# Altium PCB PCB_C20003-A.PcbDoc (part 2 of 2)
Units mil, origin at the board's own origin, x right, y up, seen from the top; angles counter-clockwise.
Board outline 2450.31 x 1640 mil, 2 copper layers (Top, Bottom), stack 12.7 mil thick; 109 components, 60 nets, 279 pads, 480 vias.
Unrouted connection lines stored in the file: 1.
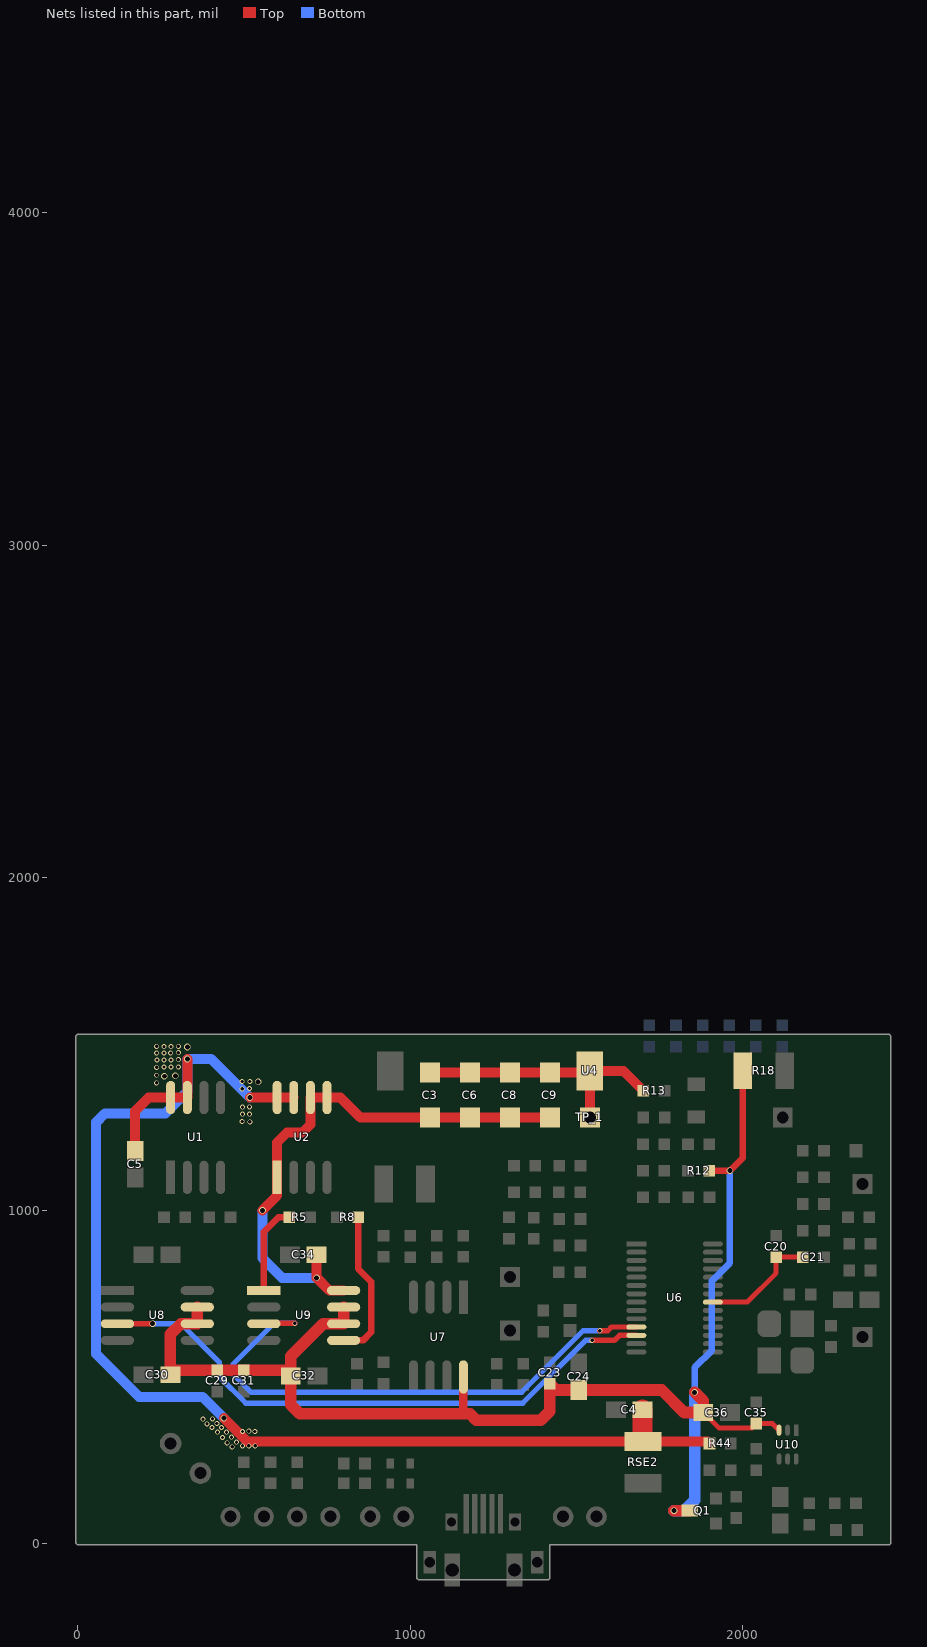
[diagram p2: the nets of this part, all layers, seen from the top]

## Via types
v1: diameter 15, hole 10, Top to Bottom, tented both sides, 451 vias
v2: diameter 20, hole 15, Top to Bottom, tented both sides, 29 vias

## Nets (pads, with @x,y where several pads share a name; then routed paths per layer and width w, separated by ;. In a path a pad name is that pad's centre, name@x,y a point inside that pad or via, vN(x,y) a via of type N, cw(c..) or ccw(c..) an arc to the next point about the centre after c; other vN are vias at no path point) (continued)
PLLCOML: C20.1 C21.1 U6.21 | length 354
  Top w15: U6.21@1910,725 1910.5,725.5 2013.5,725.5 2098.58,810.58 2098.58,811.56 2100,812.98 C20.1@2100,860 C21.1@2180,860
PWM00: U6.12 U8.3 | length 1769.3
  Top w16: U8.3@120,660 v2(226,660) ; v1(1547,610) 1614,610 1629,625 U6.12@1680,625
  Bottom w16: v2(226,660) 311,660 427,544 427,500 506,421 1338,421 1527,610 v1(1547,610)
PWM01: U6.11 U9.3 | length 1674.1
  Top w16: U9.3@561,661 v1(653,661) ; v1(1570,639) 1594,639 1605,650 U6.11@1680,650
  Bottom w16: v1(653,661) 590,661 468,539 468,508 522,454 1335,454 1520,639 v1(1570,639)
RHB: C3.1 C6.1 C8.1 C9.1 C34.1 U2.1 U2.5 U2.6 U9.8 | length 1673.3
  Top w30: v2(556,1001) 600,1045 U2.1@600,1100 600,1205 630,1235 676,1235 700,1259 U2.6@700,1340 U2.5@750,1340 790,1340 850,1280 C3.1@1060,1280 C6.1@1180,1280 C8.1@1300,1280 C9.1@1420,1280 ; C34.1@719,867 v2(719,798) 757,760 U9.8@800,760
  Top w40: C34.1@719,867 C34.1@723,863
  Bottom w30: v2(556,1001) 556,857 615,798 v2(719,798)
RLG: R8.2 U9.5 | length 454.5
  Top w20: U9.5@800,610 858,610 883,635 883,786 844,825 R8.2@844,980
RUG: R5.2 U9.1 | length 270.2
  Top w20: U9.1@560,760 560,936 604,980 R5.2@636,980
VBUS: C4.1 C5.1 R44.1 RSE2.2 U1.7 U1.8 U2.7 U2.8 | length 3944
  Top w30: C5.1@173,1179 173,1299 214,1340 U1.8@280,1340 U1.7@330,1340 v2(330,1456) ; v2(440,376) 488,328 509.5,306.5 510,306 515,306 534,306 1303.97,306 ; v2(518,1340) U2.8@600,1340 U2.7@650,1340 ; 1303.98,305.98 RSE2.2@1700,305.98 ; RSE2.2@1705.98,300 RSE2.2@1700,305.98 ; R44.1@1900,300 1894.02,305.98 RSE2.2@1700,305.98
  Top w60: RSE2.2@1699,306.98 C4.1@1699,402
  Bottom w30: v2(440,376) 375.62,440.38 184.62,440.38 56,569 56,1266 82,1292 264,1292 330,1358 v2(330,1456) 402,1456 482.5,1375.5 493.5,1364.5 504,1354 v2(518,1340)
  other v1: 465,290 496,293 515,293 534,293 450,302 478,304 436,318 463,319 421,334 448,334 496,336 533,336 515,337 404,348 433,348 389,359 419,360 377,373 406,374 518,1267 495,1268 496,1290 517,1290 496,1311 517,1312 495,1366 517,1367 238,1384 495,1388 518,1388 238,1407 238,1431 260,1432 281,1432 303,1432 239,1453 260,1453 281,1453 303,1454 238,1474 260,1474 280,1474 303,1475 260,1493 281,1493 238,1494 303,1494
  other v2: 543,1387 261,1404 294,1405 330,1492
VCC: C23.1 C24.1 C29.1 C30.1 C31.1 C32.1 C35.1 C36.1 Q1.2 R12.2 R18.1 U7.8 U8.6 U8.7 U9.6 U9.7 U10.3 | length 4401.8
  Top w15: C36.1@1881.92,393 1927.92,347 2027,347 C35.1@2040,360 2088.82,360 U10.3@2108.82,340
  Top w20: R12.2@1899,1120 v2(1961,1120) 2000,1159 R18.1@2000,1420
  Top w25: 1160,389 U7.8@1160,500
  Top w35: U8.7@360,710 U8.6@360,660 311,660 279,628 C30.1@279,507 292,520 C29.1@420,520 C31.1@500,520 624,520 C32.1@641,503 ; U9.7@800,710 U9.6@800,660 739,660 641,562 C32.1@641,503 ; v2(1793,98) Q1.2@1840,98 ; v2(1855,454) 1881,428 C36.1@1881,393 1824,393 1756,461 C24.1@1507,461 1439,461 C23.1@1420,480 1420,397 1393,370 1199,370 1180,389 1160,389 668,389 641,416 C32.1@641,503
  Bottom w20: v2(1855,454) 1855,528 1907,580 1907,789 1961,843 v2(1961,1120)
  Bottom w35: v2(1793,98) 1824,98 1855,129 v2(1855,454)
VDEMO: C3.2 C6.2 C8.2 C9.2 R13.2 TP_1.1 U4.1 | length 807.9
  Top w30: C3.2@1060,1415 C6.2@1180,1415 C8.2@1300,1415 C9.2@1420,1415 1535,1415 U4.1@1540,1420 ; TP_1.1@1540,1280 U4.1@1540,1420 ; R13.2@1701,1360 1641,1420 U4.1@1540,1420
pads on no net: U5.2 U5.3 U5.4

## Polygon pours and split planes (outlines as drawn)
GND on Top "GND" (solid): 1725,514 1711,514 1513,316 1496,299 1496,62 1674,62 1722,14 2151,14 2151,414 2143,422 2051,514 1725,514
VBUS on Top "LHB" (solid, remove dead copper, pour order 1008): 526,280 445,280 359,366 359,394 493,394 526,361 526,280
VBUS on Top "LHB" (solid, remove dead copper, pour order 1007): 1166,361 1191,336 1191,248 1078,248 1046,280 1043,283 1043,361 1166,361
VBUS on Top "LHB" (solid, remove dead copper, pour order 1006): 345,1437 345,1509 306,1509 17,1509 17,1462 17,1249 99,1249 207,1249 208,1250 208,1295 345,1295 345,1437
VBUS on Top "LHB" (solid, remove dead copper, pour order 1005): 669,1400 482,1400 482,1317 482,1249 481,1248 533,1248 533,1289 631,1289 669,1289 669,1400
IDEMO on Top "LHB" (solid, remove dead copper, pour order 1004): 721,1216 679,1174 678,1173 678,1049 721,1049 721,1092 721,1162 778,1162 778,1049 842,1049 949,1049 949,1089 949,1214 947,1216 721,1216
IDEMO on Top "LHB" (solid, remove dead copper, pour order 1003): 533,1217 533,1048 455,1048 455,1072 455,1164 405,1164 405,1050.44 404.56,1050 355.44,1050 355.44,1178.44 394,1217 533,1217
VDEMO on Top "LHB" (solid, remove dead copper, pour order 1002): 1004,1509 1004,1359 1077,1359 1344,1359 1605,1359 1605,1475 1605,1509 1004,1509
RHB on Top "LHB" (solid, remove dead copper, pour order 1001): 614,1050 623,1050 623,1079 623,1125 623,1186 670,1186 709,1225 721,1237 1334,1237 1464,1237 1464,1339 850,1339 850,1400 679,1400 679,1361 679,1275 577,1275 546,1275 546,1224 546,1050 614,1050
LHB on Top "GND" (solid, remove dead copper, pour order 1000): 361,1274 223,1274 223,1051 223,1050 297,1050 297,1144 400,1247 400,1248 400,1274 361,1274
GND on Top "GND" (solid, remove dead copper, pour order 1001): 198,1129 17,1129 17,1094 17,14 82,14 1062,14 1065,11 1049,27 1049,1130 199,1130 198,1129
GND on Top "GND" (solid, remove dead copper, pour order 1002): 251,655 251,669 233,687 225,695 225,723 225,815 226,816 249,816 249,770 253,766 287,732 287,702 287,690 265,668 265,654 252,654 251,655
GND on Top "GND" (solid, remove dead copper, pour order 1003): 158,904 319,904 330,893 331,892 331,794 410,794 410,946 236,946 222,960 206,960 201,960 154,913 145,904 158,904
GND on Top "GND" (solid, pour order 1004): 817,787 771.01,787 771.01,883.38 747.52,906.74 589,906.74 589,934 817,934 817,787
GND on Top "GND" (solid, pour order 1005): 666,813 687,813 687,789 687,785 739,733 739,705 739,697 738,696 719,696 697,674 680,674 679,674 659,694 667,702 667,716 667,812 666,813
GND on Top "GND" (solid, pour order 1006): 975,421 1132,421 1133,421.89 1133,438 976,438 975,437.11 975,421
GND on Top "GND" (solid, pour order 1007): 1177,-83 1178,-82 1400,-82 1400,38 1399,39 1333,39 1333,90 1298,90 1298,13 1294,9 1177,9 1177,-83
GND on Top "GND" (solid, pour order 1008): 1548,1195 1548,1156 1548,974 1565,957 1572,950 1618,950 1856,950 1857,949 1857,971 1755,971 1730,996 1718,1008 1718,1022 1718,1195 1548,1195
GND on Top "GND" (solid, pour order 1009): 1329,1214 1329,1091 1328,1090 1276,1090 1276,1069 1267,1060 1261,1060 1261,1058 1248,1045 1248,1029 1248,1028 1254,1022 1255,1023 1272,1023 1318,1023 1336,1005 1336,963 1336,949 1255,949 1255,902 1274,883 1275,882 1332,882 1340,874 1342,872 1342,855 1260,855 1248,843 1248,758 1255,751 1257,753 1342,753 1372,753 1375,750 1350,725 1350,710 1350,693 1345,688 1256,688 1254,688 1245,679 1253,671 1253,602 1253,599 1260,592 1352,592 1352,593 1355,596 1356,597 1356,662 1421,662 1433,650 1433,609 1433,572 1431,570 1315,570 1259,570 1235,594 1185,644 1185,662 1185,819 1193,827 1193,898 1193,1214 1329,1214
GND on Top "GND" (solid, pour order 1010): 1201,531 1202,530 1202,479 1203,479 1232,450 1302,450 1302,472 1335,505 1344.05,514.05 1382.05,514.05 1384.95,514.05 1390,509 1388,507 1388,415 1388,414 1375,401 1374,400 1218,400 1216,400 1193,423 1185,431 1185,547 1201,531
GND on Top "GND" (solid, pour order 1011): 1008.12,654.94 1008.19,655 1135,655 1135,672 1017.11,672 1007,672 1008.12,671 1008.12,654.94
GND on Top "GND" (solid, pour order 1012): 1456,418 1456,384 1422,350 1422,349 1653,349 1655,351 1655,427 1545,427 1538,420 1537,421 1480,421 1478,421 1468,431 1465,434 1456,434
GND on Top "GND" (solid, pour order 1013): 1541,590 1602,590 1591,579 1591,569 1591,562 1602,551 1624,529 1643,529 1650,529 1665,544 1675,554 1721,554 1721,730 1708,743 1699,743 1699,756 1711,756 1720,747 1732,735 1732,701 1732,627 1758,601 1760,599 1784,599 1784,492 1674,492 1547,492 1546,493 1541,498 1541,590
GND on Top "GND" (solid, pour order 1014): 1636,750 1636,806 1585,806 1572,793 1542,793 1542,785 1524,767 1523,766 1523,757 1535,745 1539,741 1636,741
GND on Top "GND" (solid, pour order 1015): 1773,880 1773,862 1773,861 1757,845 1746,834 1746,814 1772,788 1795,765 1795,724 1795,610 1774,589 1774,496 1795,475 1810,460 1811,460 1841,490 1866,490 1931,425 1931,411 1931,397 1990,397 2008,397 2009,398 2009,475 1992,475 1976,491 1976,535 1976,536 1958,554 1901,554 1874,554 1858,570 1833,595 1833,630 1833,641 1823,651 1823,667 1842,686 1852,686 1857,691 1862,696 1862,880 1773,880
GND on Top "GND" (solid, pour order 1016): 1745,414 1745,352 1808,352 1746,414 1745,414
GND on Top "GND" (solid, pour order 1017): 1375,519.22 1375,574 1431,574 1433,572.17 1434,571.26 1497,571.26 1497,516.48 1491,511 1388,511 1384,511 1375,519.22
GND on Top "GND" (solid, pour order 1018): 1601,1330 1601,1207 1602,1206 1603,1205 1715,1205 1715,1323 1659,1323 1659,1353 1641,1371 1621,1371 1621,1331 1622,1330 1601,1330
GND on Top "GND" (solid, pour order 1019): 2127,322 2195,322 2195,395 2195,396 2236,437 2274,475 2358,475 2414,531 2425,542 2425,555 2425,571 2300,571 2273,544 2231,544 2231,497 2148,497 2019,497 2019,485 2009,475 1992,458 1992,397 2052,397 2053,396 2065,384 2086,384 2104,384 2126,362 2127,361 2127,322
GND on Top "GND" (solid, pour order 1020): 2138,221 2138,184 2272,184 2272,229 2273,230 2294,251 2296,251 2360,251 2362,249 2377,234 2377,188 2377,18 2378,17 2426,17 2426,263 2280,263 2278,263 2254,287 2200,233 2178,233 2178,225 2175,222 2174,221 2138,221
GND on Top "GND" (solid, pour order 1021): 2370,263 2370,264 2409,303 2409,397 2374,432 2422,480 2424,480 2427,480 2425.93,478.93 2425.93,263 2425.93,249 2420.93,254 2373,254 2373,260 2370,263
GND on Top "GND" (solid, pour order 1022): 2382,1029 2382,1016 2380,1016 2362,998 2343,979 2343,969 2394,969 2395,970 2397,972 2397,1028
GND on Top "GND" (solid, pour order 1023): 2261,1037 2273,1037 2310,1074 2310,1034 2311,1033 2313,1031 2334,1031 2334,1024 2319,1009 2291,1009 2291,1001 2289,999 2252,999 2252,1036 2251,1037 2261,1037
GND on Top "GND" (solid, pour order 1024): 2215,1082 2216,1083 2261,1083 2261,1129 2272,1140 2305,1173 2305,1174 2305,1215 2306,1216 2308,1214 2375,1214 2375,1136 2377,1134 2420,1134 2420,1344 2419,1345 2402,1345 2398,1345 2365,1312 2288,1312 2280,1312 2237,1355 2232,1360 2232,1449 2168,1449 2167,1450 2168,1449 2168,1349 2132,1349 2131,1350 2131,1330 2170,1330 2171,1331 2172,1330 2172,1265 2172,1262 2210,1224 2215,1219 2215,1082
GND on Top "GND" (solid, pour order 1025): 2098,1333 2098,1355 2028,1355 2027,1354 2027,1203 2027,1145 1988,1106 1976,1094 1934,1094 1934,1013 1935,1014 1952,1014 1954,1014 1974,994 2098,1118 2145,1118 2152,1118 2153,1117 2147,1123 2147,1209 2147,1212 2128,1231 2125,1228 2071,1228 2071,1331 2072,1332 2073,1333 2098,1333
GND on Top "GND" (solid, pour order 1026): 2398,1345 2410,1357 2410,1413 2410,1451 2409,1452 2367,1494 2366,1494 2279,1494 2234,1449 2232,1449 2168,1449 2165,1452 2165,1505 2421,1505 2419,1503 2419,1327 2380,1327 2397,1344
GND on Top "GND" (solid, pour order 1027): 1669,1448 1703,1414 1716,1401 1818,1401 1818,1419 1817,1420 1907,1420 1907,1244 1908,1243 1938,1213 1938,1190 1938,1179 1929,1170 1931,1168 1931,1145 1949,1145 1950,1146 1973,1169 1973,1348 1974,1349 1973,1350 1960,1350 1960,1496 1958,1498 1664,1498 1664,1453 1669,1448
GND on Top "GND" (solid, pour order 1028): 1049,254.04 1049,254 1072,231 1063,222 1039,222 1039,252 1040,253 1041.04,254.04 1049,254.04
GND on Bottom "GND" (solid): 28,1809 272,1809 272,1540 271,1541 28,1541 28,1809
GND on Bottom "GND" (solid): 285,4452 285,4200 28,4200 28,4451 29,4452 285,4452
GND on Bottom "GND" (solid): 2158,4452 2158,4212 2159,4211 2419,4211 2419,4452 2158,4452
GND on Bottom "GND" (solid): 2172,1540 2172,1798 2419,1798 2419,1544 2419,1540 2172,1540
GND on Bottom "GND" (solid): 1883.19,699 1883.19,823.81 1883,824 1875,832 1778,832 1778,753.85 1832.85,699 1855.63,676.22 1860.22,676.22 1880.89,676.22 1883.19,673.92 1883.19,699
GND on Bottom "GND" (solid): 1750,685 1764,699 1969,699 1969,203 2105,67 2115,57 2132,57 2112,57 2069,14 2067.69,15.31 1399.69,15.31 1399.69,198.69 1423,222 1400,245 1400,444 1400,468 1588,656 1617,685 1751,685
GND on Bottom "GND" (solid): 1215,200 1215,254 1277,316 1287,306 1595,306 1595,198 1675,118 1669,112 1669,14 1216,14 1203,27 1215,39 1215,200
VBUS on Bottom "LHB" (solid, remove dead copper, pour order 1013): 274,424 416,282 417,281 444,281 482,281 481,282 481,360 326,515 325,514 275,514 274,514 274,424
VBUS on Bottom "LHB" (solid, remove dead copper, pour order 1012): 301,514 301,425 301,424 441,284 444,281 550,281 550,360 521,360 481,360 327,514 326,515 293,515 191,515 178,502 178,425 301,425
VBUS on Bottom "LHB" (solid, remove dead copper, pour order 1011): 204,513 148,569 73,569 19,569 18,568 161,425 204,425 204,513
IDEMO on Bottom "LHB" (solid, remove dead copper, pour order 1010): 532,1240 354,1240 354,1078.91 354,1050 518,1050 948,1050 948,1135.71 948,1240 674,1240 532,1240
VBUS on Bottom "LHB" (solid, remove dead copper, pour order 1009): 445.86,1249 561,1249 560.17,1250 560.17,1365 560.17,1509 249.79,1509 17,1509 17,1342 17,1249 445.86,1249
GND on Bottom "GND" (solid, pour order 1029): 277,735 163,735 163,683 277,683 307,683 317,683 322,678 449,551 483,585 615,717 615,769 331,769 331,743 331,735 277,735
GND on Bottom "GND" (solid, pour order 1030): 163,683 163,576 172,567 211,528 235,528 334,528 341,521 491,371 516,371 561,371 564,371 564,359 703,359 1307,359 1347,399 1349,399 493,399 492,400 397,495 397,531 397,539 304,632 300,636 207,636 207,698 163,698 163,683
GND on Bottom "GND" (solid, pour order 1031): 726,180 726,171 733,164 736,161 754,161 762,161 771,152 772,151 794,151 794,150 766,122 746,122 741,122 730,111 718,99 718,90 718,88 701,88 701,97 693,105 679,119 679,135 724,180 726,180
GND on Bottom "GND" (solid, pour order 1032): 579,38 602,61 602,72 619,72 619,61 640,40 642,38 579,38
GND on Bottom "GND" (solid, pour order 1033): 700,72 700,60 695,55 677,37 677,29.58 748,29.58 719,58.58 719,72 700,72
GND on Bottom "GND" (solid, pour order 1034): 785,39 817,71 821,67 821,29.58 785,29.58 785,39
GND on Bottom "GND" (solid, pour order 1035): 762,161 812,211 838,237 861,237 931,237 879,185 877,185 822,185 809,172 780,143 744,143 762,161
GND on Bottom "GND" (solid, pour order 1036): 759,143 788,143 841,196 816,196 812,196 759,143
GND on Bottom "GND" (solid, pour order 1037): 655,690 676,669 676,650 675,650 668,643 618,643 604,643 542,581 496,535 496,519 496,516 538,474 683,474 1323,474 1329,480 1505,656 1558,656 1588,656 1600,644 1710,644 1723,644 1740,661 1742,663 1742,667 1484,667 1472,655 1434,617 1420,617 1201,617 1138,554 1108,554 1011,554 995,570 904,570 904,699 897,706 881,690 655,690
GND on Bottom "GND" (solid, pour order 1038): 1177,199 1400,199 1401,199 1431,169 1434,166 1434,117 1411,94 1411,48 1411,44 1418,37 1418,27 1401,27 1401,-22 1401,-93 1254,-93 1040,-93 1040,15 1040,199 1177,199
GND on Bottom "GND" (solid, pour order 1039): 580,1502 580,1246.72 581,1245.74 967,1245.74 967,1023.97 969,1022 1248,1022 1248,1046.64 1263,1061.43 1264,1060.44 1340,1060.44 1340,1502 580,1502
GND on Bottom "GND" (solid, pour order 1040): 1320,1509 1320,1061 1350,1061 1356,1061 1385,1032 1386,1031 1386,990 1386,896 1432,896 1750,896 1764,882 1765,881 1765,870 1765,869 1753,857 1721,857 1385,857 1385,816 1385,744 1731,744 1784,744 1835,693 1860,668 1879,668 1879,803 1918,842 1934,858 1934,929 1934,1137 1939,1142 1950,1153 1950,1509 1320,1509
GND on Bottom "GND" (solid, pour order 1042): 899,615 1014,615 1046,583 1046,550 1103,550 1106,547 1133,547 1133,548.09 1127.09,554 1122.09,559 1109,559 1103,565 1103,579 1103,580 1110,587 1181,658 1221,658 1248,658 1249,659 1249,691 1349,691 1350,692 1349,693 1349,721 1373,745 1374,744 1399,744 1399,793 1398,794 1351,794 1351,755 1350,754 1349,753 1253,753 1253,851 1254,852 1255,851 1342,851 1342,872 1332,882 1331,882 1275,882 1255,902 1255,948 1335,948 1336,949 1336,1005 1318,1023 1258,1023 1252,1023 1234,1041 1075,1041 1065,1041 1053,1029 1049,1025 1049,893 1025,893 1000,868 980,848 980,659 978,659 944,693 942,691 896,691 896,618 899,615
GND on Bottom "GND" (solid, pour order 1043): 1832,594 1854,572 1854,562 1832,540 1831,539 1792,539 1792,581 1804,593 1805,594 1832,594
GND on Bottom "GND" (solid, pour order 1044): 1929.42,1511 2235,1511 2235,1409 2235,881 2224.44,881 2221.34,881 2213.88,869 2212.02,866 2212.02,752 2212.02,672 2210.78,670 2161.71,670 2161.71,574 2181.59,574 2181.59,570 2145.56,512 2094.63,430 2094.01,430 1993.39,430 1982.21,448 1982.21,556 1982.21,703 2019.48,763 2033.14,785 2046.19,785 2071.03,785 2083.45,805 2074.76,819 2070.41,819 2028.8,819 2026.31,819 2026.31,822 2042.46,848 2061.71,879 2061.71,916 2061.71,1022 2053.64,1035 2046.81,1035 2044.32,1035 2039.36,1027 2037.49,1024 2037.49,1015 2037.49,900 2031.28,890 1966.07,785 1965.45,785 1965.45,806 1961.72,812 1958.61,817 1958.61,854 1958.61,1130 1949.3,1145 1948.68,1146 1917,1146 1917,1511
GND on Bottom "GND" (solid, pour order 1045): 2232,1361 2282,1311 2440,1311 2440,666 2439,667 2314,667 2314,571 2315,570 2345,570 2345,566 2298,519 2209,430 2066,430 2066,658 2133,725 2195,787 2195,851 2195,1324 2232,1361
GND on Bottom "GND" (solid, pour order 1046): 1978.98,822.71 1996,805.68 1996,794 2000.56,794 2026.31,819.75 2104.65,898.09 2104.65,916 2104.65,1023.35 2068,1060 2067,1061 2021,1061 2021,912 2021,896 2021,882 2009,870 1988.06,849.06 1988.06,843 1988.06,831.79 1978.98,822.71
GND on Bottom "GND" (solid, pour order 1047): 2225,1503 2419,1503 2419,1302 2372,1302 2371,1303 2368,1306 2368,1311 2405,1348 2410,1353 2410,1431 2410,1453 2366,1497 2301,1497 2282,1497 2225,1440 2225,1503
GND on Bottom "GND" (solid, pour order 1048): 17,408 56,408 56,400 37,381 30,374 30,321 30,307 66,271 76,261 146,261 156,261 196,301 202,307 202,378 202,384 174,412 259,412 262,412 350,324 352,322 323,322 302,343 252,343 235,326 234,325 234,283 234,280 265,249 297,249 326,278 354,278 368,264 370,262 370,257 350,257 323,230 323,191 323,190 346,167 350,163 386,163 393,163 421,191 597,191 597,132 594,129 512,129 512,16 368,16 17,16 17,408
GND on Bottom "GND" (solid, pour order 1049): 597,132 609,132 624,117 619,112 619,72 602,72 602,112 594,120 577,137 552,137 552,145 595,145 595,134 597,132
GND on Bottom "GND" (solid, pour order 1050): 989,199 922,132 858,132 843,117 809,83 809,52 809,29.58 1026,29.58 1026,198 1025,199 989,199
GND on Bottom "GND" (solid, pour order 1051): 642,225 642,198 655,198 676,219 676,281 743,348 613,348 569,348 569,268 406,268 352,322 323,322 330,315 326,311 326,278 329,278 350,257 389,257 394,257 408,243 417,234 450,234 633,234 642,225
GND on Bottom "GND" (solid, pour order 1052): 2233,382 2233,303 2233,302 2269,266 2272,263 2368,263 2369,263 2404,298 2409,303 2409,397 2372,434 2291,434 2291,457 2352,518 2377,543 2377,545 2388,545 2389,544 2390,543 2390,489 2390,487 2399,478 2401,480 2428,480 2428,20 2425,17 2337,17 2337,92 2326,103 2325,104 2325,155 2348,155 2365,172 2377,184 2377,227 2377,230 2358,249 2357,250 2256,250 2240,250 2207,283 2212,288 2212,382 2233,382
GND on Bottom "GND" (solid, pour order 1053): 2326,103 2093,103 2092,103 2037,158 2043,164 2108,164 2113,164 2126,177 2126,199 2118,207 2117,208 2097,208 2023,208 1989,242 1985,246 1985,331 1985,424 2018,391 2033,391 2222,391 2256,425 2376,545 2388,545 2388,542 2290,444 2233,387 2233,382 2233,307 2289,251 2270,232 2270,203 2270,185 2281,174 2300,155 2325,155 2325,104 2326,103
GND on Bottom "GND" (solid, pour order 1054): 2291,434 2274,434 2274,440 2291,457
GND on Bottom "GND" (solid, pour order 1055): 2054,59 2043,48 2037,48 2068,48 2067,49 2067,59 2054,59
GND on Bottom "GND" (solid, pour order 1056): 760,826 636,826 634,828 594,868 594,875 768,875 778,865 776,863 776,826 760,826
GND on Bottom "GND" (solid, pour order 1057): 595,769 517,847 517,743 516,742 595,742 595,769
GND on Bottom "GND" (solid, pour order 1058): 272,1540 272,1809 28,1809 28,1927 28,4198 27,4199 28,4200 285,4200 285,4452 286,4453 329,4453 2158,4453 2158,4235 2158,4212 2159,4211 2419,4211 2419,1798 2172,1798 2172,1540 2173,1539 2172,1540 272,1540

## Keep-outs
Keep-Out Layer:
  circle w10: c2322.62,344.44 r66.93
  circle w10: c2322.6,206.96 r30.53
  circle w10: c2322.28,1407.29 r66.93
  circle w10: c117.86,1407.59 r66.93
  circle w10: c117.98,344.33 r66.93
  circle w10: c117.96,206.85 r30.53
  circle w10: c2282.52,1682.48 r88.58
  circle w10: c2282.52,4320.28 r88.58
  circle w10: c157.48,4320.28 r88.58
  circle w10: c157.48,1682.48 r88.58
  lines w10: -0.31,1525 2440,1525 ; 56.36,345 183.64,345 ; 59.79,1405 180.21,1405 ; 81.46,205 148.54,205 ; 2258.97,1405 2381.03,1405 ; 2264.79,345 2385.21,345 ; 2292.98,205 2357.02,205 ; 2440,4477.76 2440,0 1415,0 1415,-105 1025,-105 1025,0 0,0 0,4477.76 2440.31,4477.76

## Other copper
Top:
  rectangle net GND: 18.4,15 1049,38
  rectangle net 5V: 1882,117 1924,238
  rectangle net VBUS: 487,280 1166,361
  rectangle net VBUS: 1078,248 1166,361
  rectangle net VBUS: 487,280 1166,336
  rectangle net GND: 989,17 1086,238
  rectangle net GND: 1040,-83 1177,238
  rectangle net GND: 989,165 1249,238
  rectangle net 5V: 1902,117 2294,165
  rectangle net VBUS: 1139,248 1528,336
  rectangle net VBUS: 17,1149 208,1295
  rectangle net VBUS: 1473,248 1917,336
  rectangle net 5V: 1263,99 1384,237
  rectangle net 5V: 1363,50 1746,237
  rectangle net IDEMO: 455.44,1048 492.86,1063.5
  rectangle net IDEMO: 355.44,1050 404.56,1063.5
  rectangle net LHB: 869,1361 980,1509
  rectangle net LHB: 361,1412 980,1509
  rectangle net LHB: 361,1231 463,1509
  rectangle net VBUS: 197,1286 345,1306
  rectangle net GND: 1737,952.11 1921,971
  rectangle net GND: 1821,924 1928,971
  rectangle net GND: 22,281 36,410.86
  rectangle net GND: 961.99,965 1237,1215
  rectangle net GND: 1029,924 1080,982
  rectangle net GND: 1381,14 1785,37
  rectangle net GND: 1031,671 1135,680
  rectangle net GND: 1769,14 1880,56
  rectangle net GND: 1745,344 1888,355
  rectangle net GND: 1870,14 2179,33
  rectangle net GND: 2054,14 2284,88
  rectangle net GND: 1425.07,511 1589,590
  rectangle net GND: 1768,211 1860,238
  rectangle net GND: 1768,126 1869,149
  rectangle net GND: 2019,497 2116,589
  rectangle net GND: 2184,621 2256,766
  rectangle net GND: 2255,668 2422,696
  rectangle net GND: 2408,555 2426,695
  rectangle net GND: 2351,679 2426,844
  rectangle net GND: 2219,828 2289,957
  rectangle net GND: 2343,930 2420,969
  rectangle net GND: 2382,949 2420,1029
  rectangle net GND: 2405,1013 2420,1206
  rectangle net GND: 1622,1494 2419,1509
  rectangle net GND: 1622,1446 1958,1509
  rectangle net GND: 60,251 160,261
  rectangle net RHB: 546,1013 588,1060
  rectangle net GND: 520,21 805,34
Bottom:
  rectangle net GND: 701,58.58 719,97
  rectangle net GND: 1860,695 1882,813
  rectangle net GND: 498,16 1058.58,27
  rectangle net GND: 163,683 277,1239
  rectangle net GND: 1040,-83 1177,64
  rectangle net GND: 989,17 1177,199
  rectangle net VBUS: 17,425 301,514
  rectangle net VBUS: 17,425 150,1295
  rectangle net GND: 163,1207 343,1239
  rectangle net GND: 331,702 343,1239
  rectangle net GND: 333,717.5 527,1037
  rectangle net GND: 488,687 1000,769
  rectangle net GND: 486,762 548,815
  rectangle net GND: 590,866 1072,1033
  rectangle net GND: 1000,743 1008,747
  rectangle net GND: 754,769 1000,892
  rectangle net GND: 1385,744 1804,761
  rectangle net GND: 2022,17 2425,52
  rectangle net GND: 2054,48 2425,59
  rectangle net GND: 1231,852 1342,1005
  rectangle net GND: 326,268 339,331
  rectangle net GND: 1998,27 2030,52
Multi-Layer:
  circle w6: c-1007,1888 r30
  circle w6: c-1007,1888 r20
  lines w6: -1067,1888 -1022,1888 ; -1012,1888 -1007,1888 ; -1007,1839 -1007,1873 ; -1007,1883 -1007,1888 ; -1007,1893 -1007,1888 ; -1007,1903 -1007,1948 ; -1002,1888 -1007,1888 ; -992,1888 -942,1888

## Silkscreen, mask and mechanical layers (free items; w line width, h text height)
Silkscreen Top:
  text "HT66FW2230" at 1623,477 h40
  text "HOLTEK" at 1046,322 h40
  text "HTWPTX-V302" at 1046,268 h40
  text "2014/09" at 1046,216 h40
Silkscreen Bottom:
  text "Wireless Power Transmitter" at 1684,470 h50